# EAGLE board DetBackplane01 (EAGLE 7.7.0)
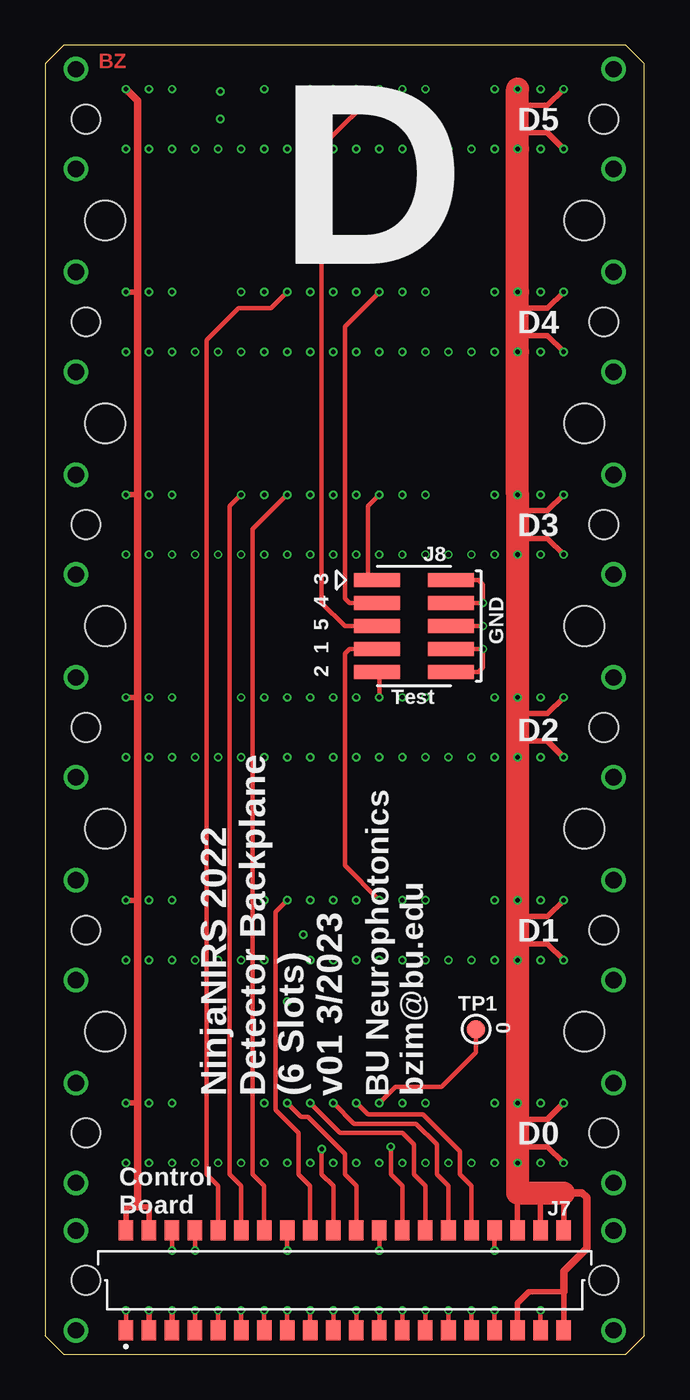
[diagram p0: board, top side]
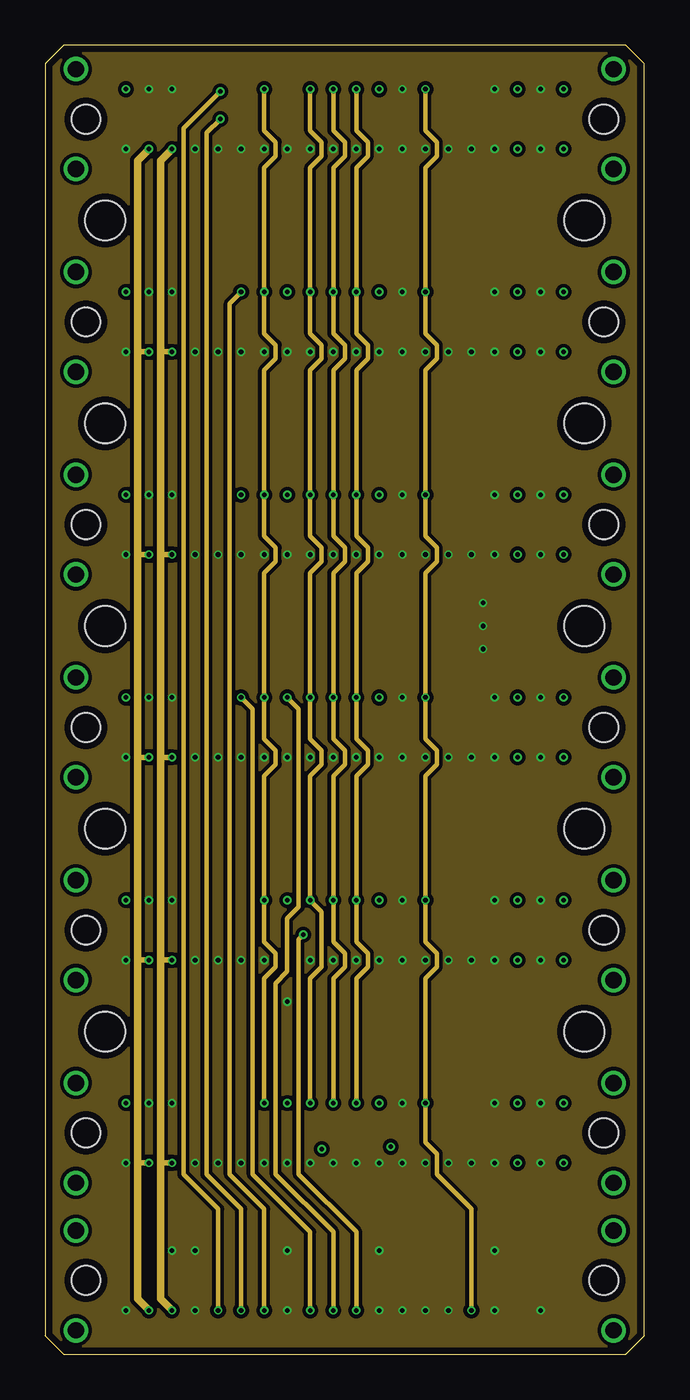
[diagram p1: board, inner layer Route2]
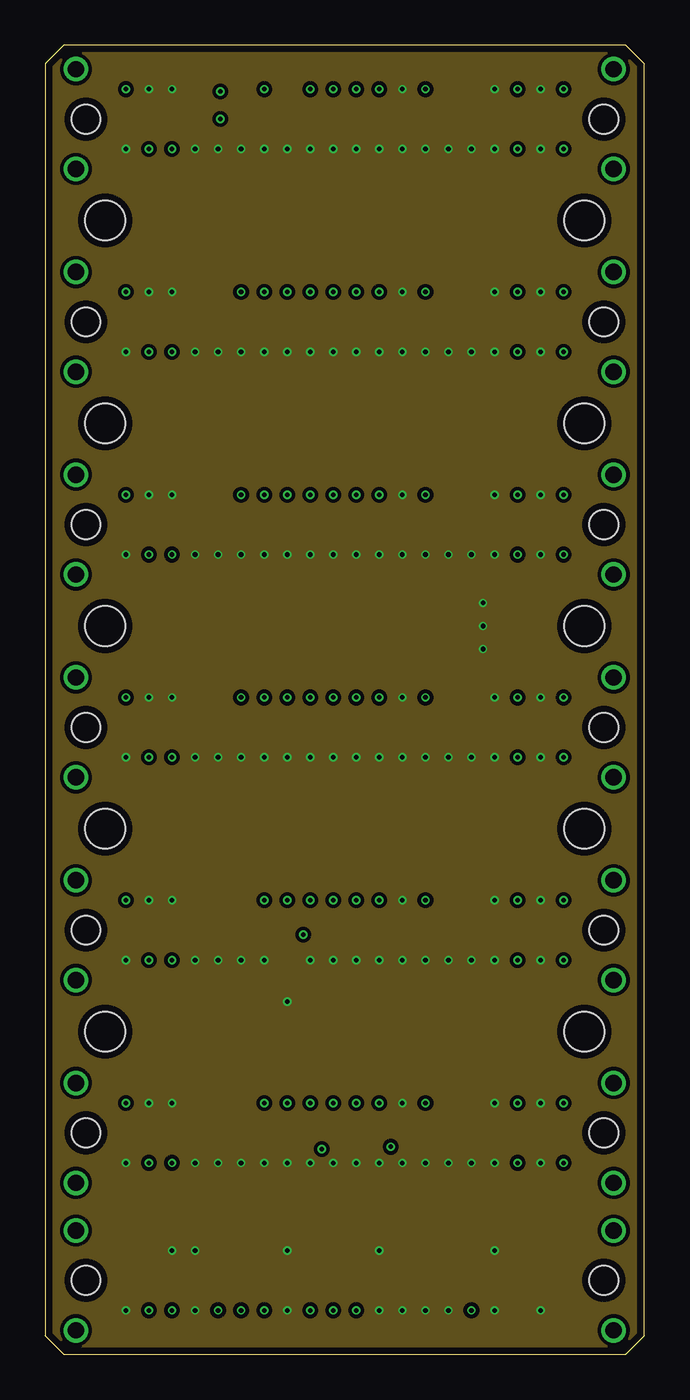
[diagram p2: board, inner layer Route15]
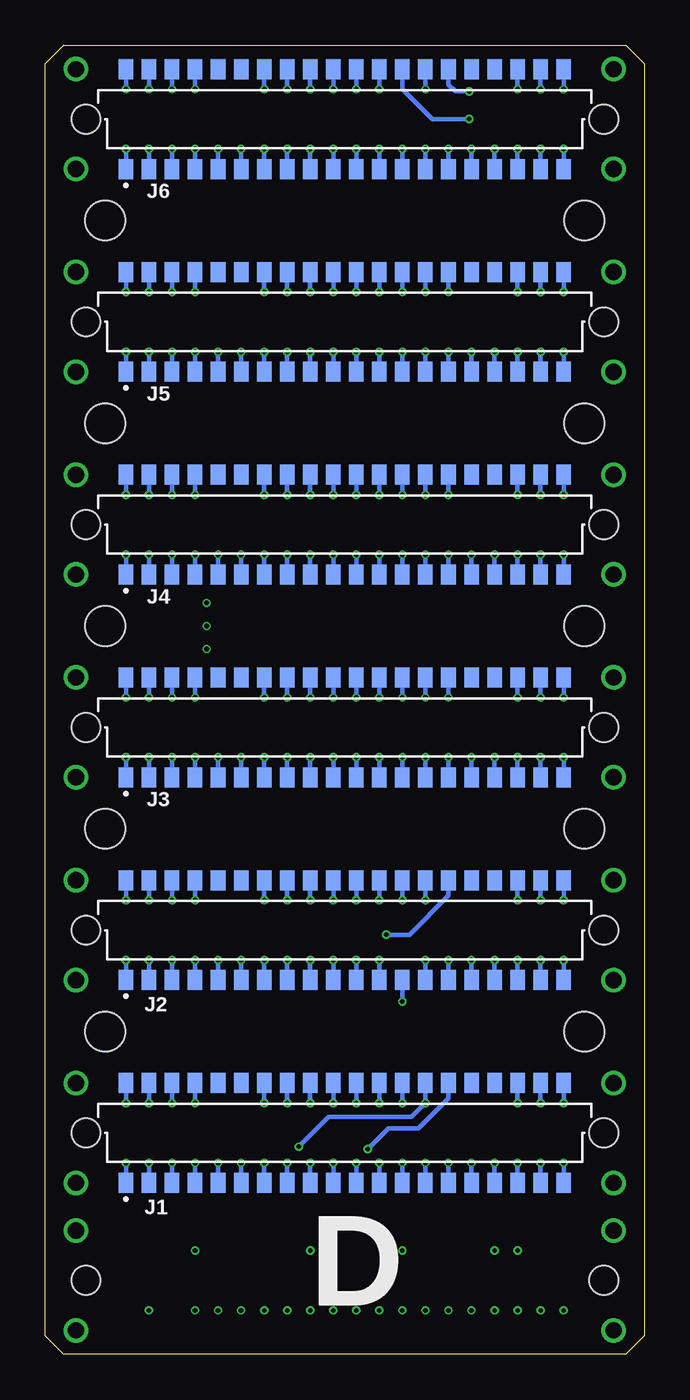
[diagram p3: board, bottom side, seen from below]

Size 33.02 x 72.14 mm. Coordinates in mm from the lower left corner, seen from the top.
Outline: 0,71.12 0,1.02 1.02,0 32,0 33.02,1.02 33.02,71.12 32,72.14 1.02,72.14 0,71.12
Copper layers (1*2*15*16): Top 0.035559375mm / dielectric 0.17018125mm / Route2 0.01778125mm / dielectric 47mil / Route15 0.01778125mm / dielectric 0.17018125mm / Bottom 0.035559375mm
Design rules "OSHPark-4layer *": minimum track width 5mil, minimum drill 10mil, track to track 5mil, track to pad 5mil, pad to pad 5mil, via to via 5mil, smd to smd 5mil, copper to edge 15mil, drill to drill 6mil, minimum pad ring 4mil, minimum via ring 4mil, stop-mask expansion 2.5mil, vias tented up to drill 12mil, thermal gap 10mil
Holes 2.2 mm at 3.3,40.13 3.3,28.96 3.3,17.78 29.72,40.13 29.72,28.96 29.72,17.78 3.3,51.31 3.3,62.48 29.72,51.31 29.72,62.48

## Footprints (pad centres in the part's own frame; a part is rotated, then mirrored left to right if it is on the bottom)
M20X2_HARFLEX_F_STR_MPTH = smd 0.8 x 1.1: A1 12.065,2.75; A2 10.795,2.75; A3 9.525,2.75; A4 8.255,2.75; A5 6.985,2.75; A6 5.715,2.75; A7 4.445,2.75; A8 3.175,2.75; A9 1.905,2.75; A10 0.635,2.75; A11 -0.635,2.75; A12 -1.905,2.75; A13 -3.175,2.75; A14 -4.445,2.75; A15 -5.715,2.75; A16 -6.985,2.75; A17 -8.255,2.75; A18 -9.525,2.75; A19 -10.795,2.75; A20 -12.065,2.75; B1 12.065,-2.75; B2 10.795,-2.75; B3 9.525,-2.75; B4 8.255,-2.75; B5 6.985,-2.75; B6 5.715,-2.75; B7 4.445,-2.75; B8 3.175,-2.75; B9 1.905,-2.75; B10 0.635,-2.75; B11 -0.635,-2.75; B12 -1.905,-2.75; B13 -3.175,-2.75; B14 -4.445,-2.75; B15 -5.715,-2.75; B16 -6.985,-2.75; B17 -8.255,-2.75; B18 -9.525,-2.75; B19 -10.795,-2.75; B20 -12.065,-2.75 | drill 0.9 pad 1.35: M1 -14.825,2.75; M2 14.825,2.75; M3 -14.825,-2.75; M4 14.825,-2.75 | hole 1.6: -14.275,0; 14.275,0
M05X2_0.050_SMD_NO_CREAM = smd 2.54 x 0.762: 1 -2.032,2.54; 2 2.032,2.54; 3 -2.032,1.27; 4 2.032,1.27; 5 -2.032,0; 6 2.032,0; 7 -2.032,-1.27; 8 2.032,-1.27; 9 -2.032,-2.54; 10 2.032,-2.54
TESTPAD_ROUND = smd 1.016 x 1.016: P$1 0,0

## Placement (x,y rotation side)
J1  M20X2_STR_MPTH  [M20X2_HARFLEX_F_STR_MPTH]  16.51,12.19 180 bottom
J2  M20X2_STR_MPTH  [M20X2_HARFLEX_F_STR_MPTH]  16.51,23.37 180 bottom
J3  M20X2_STR_MPTH  [M20X2_HARFLEX_F_STR_MPTH]  16.51,34.54 180 bottom
J4  M20X2_STR_MPTH  [M20X2_HARFLEX_F_STR_MPTH]  16.51,45.72 180 bottom
J5  M20X2_STR_MPTH  [M20X2_HARFLEX_F_STR_MPTH]  16.51,56.9 180 bottom
J6  M20X2_STR_MPTH  [M20X2_HARFLEX_F_STR_MPTH]  16.51,68.07 180 bottom
J7  M20X2_STR_MPTH  [M20X2_HARFLEX_F_STR_MPTH]  16.51,4.06 180 top
J8  M05X2_SMD_0.050_NOCREAM  [M05X2_0.050_SMD_NO_CREAM]  20.32,40.13 0 top
TP1  TESTPOINT_ROUND  [TESTPAD_ROUND]  23.75,17.91 0 top

## Library data of the parts
J1-J8 TP1 = MyLib

## Nets
DET_C0: J1.B10 J2.B10 J3.B10 J4.B10 J5.B10 J6.B10 J7.B16
DET_C1: J1.B11 J2.B11 J3.B11 J4.B11 J5.B11 J6.B11 J7.B15
DET_C2: J1.B12 J2.B12 J3.B12 J4.B12 J5.B12 J6.B12 J7.B14
DET_C3: J1.B14 J2.B14 J3.B14 J4.B14 J5.B14 J6.B14 J7.B13
DET_D0: J1.B13 J7.B11
DET_D1: J1.B15 J7.B10
DET_D2: J2.B13 J7.B9
DET_D3: J2.B15 J7.A11
DET_D4: J3.B13 J7.A10
DET_D5: J3.B15 J7.A9
DET_D6: J4.B13 J7.B7
DET_D7: J4.B15 J7.B6
DET_D8: J5.B13 J7.B5
DET_D9: J5.B15 J7.A7
DET_D10: J6.B13 J7.A6
DET_D11: J6.B15 J7.A5
DETB_RUN: J1.B7 J2.B7 J3.B7 J4.B7 J5.B7 J6.B7 J7.A16
GND: J1.A2 J1.A4 J1.A5 J1.A6 J1.A7 J1.A8 J1.A9 J1.A10 J1.A11 J1.A12 J1.A13 J1.A14 J1.A15 J1.A16 J1.A17 J1.A20 J1.B2 J1.B4 J1.B8 J1.B18 J1.B19 J2.A2 J2.A4 J2.A5 J2.A6 J2.A7 J2.A8 J2.A9 J2.A10 J2.A11 J2.A12 J2.A13 J2.A14 J2.A15 J2.A16 J2.A17 J2.A20 J2.B2 J2.B4 J2.B8 J2.B18 J2.B19 J3.A2 J3.A4 J3.A5 J3.A6 J3.A7 J3.A8 J3.A9 J3.A10 J3.A11 J3.A12 J3.A13 J3.A14 J3.A15 J3.A16 J3.A17 J3.A20 J3.B2 J3.B4 J3.B8 J3.B18 J3.B19 J4.A2 J4.A4 J4.A5 J4.A6 J4.A7 J4.A8 J4.A9 J4.A10 J4.A11 J4.A12 J4.A13 J4.A14 J4.A15 J4.A16 J4.A17 J4.A20 J4.B2 J4.B4 J4.B8 J4.B18 J4.B19 J5.A2 J5.A4 J5.A5 J5.A6 J5.A7 J5.A8 J5.A9 J5.A10 J5.A11 J5.A12 J5.A13 J5.A14 J5.A15 J5.A16 J5.A17 J5.A20 J5.B2 J5.B4 J5.B8 J5.B18 J5.B19 J6.A2 J6.A4 J6.A5 J6.A6 J6.A7 J6.A8 J6.A9 J6.A10 J6.A11 J6.A12 J6.A13 J6.A14 J6.A15 J6.A16 J6.A17 J6.A20 J6.B2 J6.B4 J6.B8 J6.B18 J6.B19 J7.A1 J7.A4 J7.A8 J7.A12 J7.A13 J7.A14 J7.A15 J7.A17 J7.A19 J7.B3 J7.B4 J7.B8 J7.B12 J7.B17 J8.2 J8.4 J8.6 J8.8 J8.10
N$1: J1.B9 TP1.P$1
RES1: J2.B9 J8.7
RES2: J3.B9 J8.9
RES3: J4.B9 J8.1
RES4: J5.B9 J8.3
RES5: J6.B9 J8.5
V5P1: J1.A1 J1.A3 J1.B1 J1.B3 J2.A1 J2.A3 J2.B1 J2.B3 J3.A1 J3.A3 J3.B1 J3.B3 J4.A1 J4.A3 J4.B1 J4.B3 J5.A1 J5.A3 J5.B1 J5.B3 J6.A1 J6.A3 J6.B1 J6.B3 J7.A18 J7.A20 J7.B18 J7.B19 J7.B20
V9P0: J1.A18 J2.A18 J3.A18 J4.A18 J5.A18 J6.A18 J7.A3
VN3P4: J1.A19 J2.A19 J3.A19 J4.A19 J5.A19 J6.A19 J7.A2
VN22: J1.B20 J2.B20 J3.B20 J4.B20 J5.B20 J6.B20 J7.B1 J7.B2

## Tracks (layer width: path | path; a pad name or v marks a point on that pad's centre or on a via)
DET_C0  (via drill 0.25)
  Top 0.254: J7.B16 23.5,9.27 22.86,9.91 22.86,11.18 20.83,13.21 17.78,13.21 v17.14,13.84
  Route2 0.254: v17.14,13.84 17.14,20.7 17.78,21.34 17.78,22.1 17.14,22.73 v17.14,25.02 17.14,31.88 17.78,32.51 17.78,33.27 17.14,33.91 v17.14,36.2 17.14,43.05 17.78,43.69 17.78,44.45 17.14,45.09 v17.14,47.37 17.14,54.23 17.78,54.86 17.78,55.63 17.14,56.26 v17.14,58.55 17.14,65.41 17.78,66.04 17.78,66.8 17.14,67.44 v17.14,69.72
  Bottom 0.254: v17.14,69.72 J6.B10 | J5.B10 v17.14,58.55 | J1.B10 v17.14,13.84 | J3.B10 v17.14,36.2 | J4.B10 v17.14,47.37 | J2.B10 v17.14,25.02
DET_C1  (via drill 0.25)
  Top 0.254: J7.B15 22.23,9.27 21.59,9.91 21.59,11.56 20.45,12.7 17.02,12.7 v15.88,13.84
  Route2 0.254: v15.88,13.84 15.88,20.7 16.51,21.34 16.51,22.1 15.88,22.73 v15.88,25.02 15.88,31.88 16.51,32.51 16.51,33.27 15.88,33.91 v15.88,36.2 15.88,43.05 16.51,43.69 16.51,44.45 15.88,45.09 v15.88,47.37 15.88,54.23 16.51,54.86 16.51,55.63 15.88,56.26 v15.88,58.55 15.88,65.41 16.51,66.04 16.51,66.8 15.88,67.44 v15.88,69.72
  Bottom 0.254: v15.88,69.72 J6.B11 | J5.B11 v15.88,58.55 | J1.B11 v15.88,13.84 | J3.B11 v15.88,36.2 | J4.B11 v15.88,47.37 | J2.B11 v15.88,25.02
DET_C2  (via drill 0.25)
  Top 0.254: J7.B14 20.95,9.27 20.32,9.91 20.32,11.56 19.68,12.19 16.26,12.19 v14.61,13.84
  Route2 0.254: v14.61,13.84 14.61,20.7 15.24,21.34 15.24,24.38 v14.61,25.02 14.61,31.88 15.24,32.51 15.24,33.27 14.61,33.91 v14.61,36.2 14.61,43.05 15.24,43.69 15.24,44.45 14.61,45.09 v14.61,47.37 14.61,54.23 15.24,54.86 15.24,55.63 14.61,56.26 v14.61,58.55 14.61,65.41 15.24,66.04 15.24,66.8 14.61,67.44 v14.61,69.72
  Bottom 0.254: v14.61,69.72 J6.B12 | J5.B12 v14.61,58.55 | J2.B12 v14.61,25.02 | J1.B12 v14.61,13.84 | J3.B12 v14.61,36.2 | J4.B12 v14.61,47.37
DET_C3  (via drill 0.25)
  Top 0.254: J7.B13 19.68,9.27 19.05,9.91 v19.05,11.43
  Route2 0.254: v12.06,13.84 12.06,20.7 12.7,21.34 12.7,22.1 12.06,22.73 v12.06,25.02 12.06,31.88 12.7,32.51 12.7,33.27 12.06,33.91 v12.06,36.2 12.06,43.05 12.7,43.69 12.7,44.45 12.06,45.09 v12.06,47.37 12.06,54.23 12.7,54.86 12.7,55.63 12.06,56.26 v12.06,58.55 12.06,65.41 12.7,66.04 12.7,66.8 12.06,67.44 v12.06,69.72
  Bottom 0.254: v19.05,11.43 17.4,13.08 12.83,13.08 v12.06,13.84 J1.B14 | v12.06,69.72 J6.B14 | J2.B14 v12.06,25.02 | J3.B14 v12.06,36.2 | J4.B14 v12.06,47.37 | J5.B14 v12.06,58.55
DET_D0  (via drill 0.25)
  Top 0.254: J7.B11 17.14,9.27 16.51,9.91 16.51,11.05 14.48,13.08 14.1,13.08 v13.34,13.84
  Bottom 0.254: J1.B13 v13.34,13.84
DET_D1  (via drill 0.25)
  Top 0.254: J7.B10 15.88,9.27 15.24,9.91 v15.24,11.3
  Bottom 0.254: v15.24,11.3 14.1,12.45 12.45,12.45 10.79,14.1 J1.B15
DET_D2  (via drill 0.25)
  Top 0.254: J7.B9 14.61,9.27 13.97,9.91 13.97,12.19 12.7,13.46 12.7,24.38 v13.34,25.02
  Bottom 0.254: v13.34,25.02 J2.B13
DET_D3  (via drill 0.25)
  Top 0.254: J7.A11 v17.14,2.41
  Route2 0.254: v17.14,2.41 17.14,6.73 13.97,9.91 13.97,22.86 v14.22,23.11
  Bottom 0.254: v14.22,23.11 12.95,23.11 10.79,25.27 J2.B15
DET_D4  (via drill 0.25)
  Top 0.254: J7.A10 v15.88,2.41
  Route2 0.254: v15.88,2.41 15.88,6.73 12.7,9.91 12.7,20.45 13.34,21.08 13.34,24 13.97,24.64 13.97,35.56 v13.34,36.2
  Bottom 0.254: v13.34,36.2 J3.B13
DET_D5  (via drill 0.25)
  Top 0.254: J7.A9 v14.61,2.41
  Route2 0.254: v14.61,2.41 14.61,6.73 11.43,9.91 11.43,35.56 v10.79,36.2
  Bottom 0.254: v10.79,36.2 J3.B15
DET_D6  (via drill 0.25)
  Top 0.254: J7.B7 12.06,9.27 11.43,9.91 11.43,45.47 v13.34,47.37
  Bottom 0.254: v13.34,47.37 J4.B13
DET_D7  (via drill 0.25)
  Top 0.254: J7.B6 10.79,9.27 10.16,9.91 10.16,46.74 v10.79,47.37
  Bottom 0.254: v10.79,47.37 J4.B15
DET_D8  (via drill 0.25)
  Top 0.254: J7.B5 9.53,9.27 8.89,9.91 8.89,55.88 10.67,57.66 12.45,57.66 v13.34,58.55
  Bottom 0.254: v13.34,58.55 J5.B13
DET_D9  (via drill 0.25)
  Top 0.254: J7.A7 v12.06,2.41
  Route2 0.254: v12.06,2.41 12.06,8 10.16,9.91 10.16,57.91 v10.79,58.55
  Bottom 0.254: v10.79,58.55 J5.B15
DET_D10  (via drill 0.25)
  Top 0.254: J7.A6 v10.79,2.41
  Route2 0.254: v10.79,2.41 10.79,8 8.89,9.91 8.89,67.31 v9.65,68.07
  Bottom 0.254: v9.65,68.07 11.68,68.07 13.34,69.72 J6.B13
DET_D11  (via drill 0.25)
  Top 0.254: J7.A5 v9.53,2.41
  Route2 0.254: v9.53,2.41 9.53,8 7.62,9.91 7.62,67.56 v9.65,69.6
  Bottom 0.254: v9.65,69.6 10.41,69.6 10.79,69.98 J6.B15
DETB_RUN  (via drill 0.25)
  Top 0.254: J7.A16 v23.5,2.41
  Route2 0.254: v23.5,2.41 23.5,8 21.59,9.91 21.59,11.05 20.95,11.68 v20.95,13.84 20.95,20.7 21.59,21.34 21.59,22.1 20.95,22.73 v20.95,25.02 20.95,31.88 21.59,32.51 21.59,33.27 20.95,33.91 v20.95,36.2 20.95,43.05 21.59,43.69 21.59,44.45 20.95,45.09 v20.95,47.37 20.95,54.23 21.59,54.86 21.59,55.63 20.95,56.26 v20.95,58.55 20.95,65.41 21.59,66.04 21.59,66.8 20.95,67.44 v20.95,69.72
  Bottom 0.254: J4.B7 v20.95,47.37 | J3.B7 v20.95,36.2 | J2.B7 v20.95,25.02 | v20.95,13.84 J1.B7 | v20.95,69.72 J6.B7 | J5.B7 v20.95,58.55
GND  (via drill 0.25)
  Top 0.254: J7.B17 v24.77,5.71 | J7.B12 v18.41,5.71 | J7.A17 v24.77,2.41 | J7.A19 v27.3,2.41 | J7.A15 v22.23,2.41 | J7.A14 v20.95,2.41 | J7.A13 v19.68,2.41 | J7.A12 v18.41,2.41 | J7.B8 v13.34,5.71 | J7.B4 v8.26,5.71 | J7.B3 v6.99,5.71 | J7.A1 v4.45,2.41 | J7.A4 v8.26,2.41 | J7.A8 v13.34,2.41 | J8.2 23.88,42.67 24.13,42.42 v24.13,41.4 J8.4 | J8.10 23.88,37.59 24.13,37.85 v24.13,38.86 J8.8 | J8.6 v24.13,40.13
  Bottom 0.254: J4.B19 v5.71,47.37 | J4.B18 v6.99,47.37 | J4.A20 v4.45,44.07 | J4.A16 v9.53,44.07 | J4.A17 v8.26,44.07 | J4.A15 v10.79,44.07 | J4.A14 v12.06,44.07 | J4.A13 v13.34,44.07 | J4.A12 v14.61,44.07 | J4.A11 v15.88,44.07 | J4.A10 v17.14,44.07 | J4.A9 v18.41,44.07 | J4.A8 v19.68,44.07 | J4.A6 v22.23,44.07 | J4.A5 v23.5,44.07 | J4.A4 v24.77,44.07 | J4.A7 v20.95,44.07 | J4.A2 v27.3,44.07 | J4.B4 v24.77,47.37 | J4.B2 v27.3,47.37 | J4.B8 v19.68,47.37 | J3.B4 v24.77,36.2 | J3.B2 v27.3,36.2 | J3.A2 v27.3,32.89 | J3.A5 v23.5,32.89 | J3.A4 v24.77,32.89 | J3.A7 v20.95,32.89 | J3.A8 v19.68,32.89 | J3.B8 v19.68,36.2 | J3.A9 v18.41,32.89 | J3.A10 v17.14,32.89 | J3.A11 v15.88,32.89 | J3.A12 v14.61,32.89 | J3.A13 v13.34,32.89 | J3.A14 v12.06,32.89 | J3.A15 v10.79,32.89 | J3.A16 v9.53,32.89 | J3.A17 v8.26,32.89 | J3.A20 v4.45,32.89 | v5.71,36.2 J3.B19 | v6.99,36.2 J3.B18 | J3.A6 v22.23,32.89 | v6.99,25.02 J2.B18 | v5.71,25.02 J2.B19 | J2.A20 v4.45,21.72 | J2.A17 v8.26,21.72 | J2.A16 v9.53,21.72 | J2.A15 v10.79,21.72 | J2.A14 v12.06,21.72 | J2.A12 v14.61,21.72 | J2.A10 v17.14,21.72 | J2.A9 v18.41,21.72 | J2.A8 v19.68,21.72 | J2.A7 v20.95,21.72 | J2.A6 v22.23,21.72 | J2.A5 v23.5,21.72 | J2.A4 v24.77,21.72 | v27.3,25.02 J2.B2 | J2.B4 v24.77,25.02 | J2.A2 v27.3,21.72 | J2.B8 v19.68,25.02 | v19.68,13.84 J1.B8 | v24.77,13.84 J1.B4 | v27.3,13.84 J1.B2 | v27.3,10.54 J1.A2 | v24.77,10.54 J1.A4 | v23.5,10.54 J1.A5 | v22.23,10.54 J1.A6 | v20.95,10.54 J1.A7 | v19.68,10.54 J1.A8 | v17.14,10.54 J1.A10 | v15.88,10.54 J1.A11 | v14.61,10.54 J1.A12 | J1.A14 v12.06,10.54 | J1.A15 v10.79,10.54 | J1.A16 v9.53,10.54 | J1.A17 v8.26,10.54 | J1.A20 v4.45,10.54 | v5.71,13.84 J1.B19 | v6.99,13.84 J1.B18 | J1.A13 v13.34,10.54 | J1.A9 v18.41,10.54 | J2.A11 v15.88,21.72 | v27.3,69.72 J6.B2
  Bottom 0.254: v24.77,69.72 J6.B4 | v24.77,66.42 J6.A4 | v27.3,66.42 J6.A2 | v23.5,66.42 J6.A5 | v22.23,66.42 J6.A6 | v20.95,66.42 J6.A7 | v19.68,69.72 J6.B8 | v19.68,66.42 J6.A8 | v18.41,66.42 J6.A9 | v17.14,66.42 J6.A10 | v15.88,66.42 J6.A11 | v14.61,66.42 J6.A12 | v13.34,66.42 J6.A13 | v12.06,66.42 J6.A14 | v10.79,66.42 J6.A15 | v9.53,66.42 J6.A16 | v8.26,66.42 J6.A17 | v4.45,66.42 J6.A20 | v5.71,69.72 J6.B19 | v6.99,69.72 J6.B18 | v27.3,58.55 J5.B2 | v24.77,58.55 J5.B4 | v19.68,58.55 J5.B8 | J5.A2 v27.3,55.24 | J5.A4 v24.77,55.24 | J5.A5 v23.5,55.24 | J5.A6 v22.23,55.24 | J5.A7 v20.95,55.24 | J5.A8 v19.68,55.24 | J5.A9 v18.41,55.24 | J5.A10 v17.14,55.24 | J5.A12 v14.61,55.24 | J5.A13 v13.34,55.24 | J5.A14 v12.06,55.24 | J5.A15 v10.79,55.24 | J5.A16 v9.53,55.24 | J5.A17 v8.26,55.24 | J5.A20 v4.45,55.24 | J5.B18 v6.99,58.55 | J5.B19 v5.71,58.55 | J2.A13 v13.34,19.43 | J5.A11 v15.88,55.24
  pour Route15 (isolate 0.203, rank 2): 0,72.14 33.02,72.14 33.02,0 0,0
  pour Route2 (isolate 0.203, rank 2): 0,72.14 33.02,72.14 33.02,0 0,0
N$1  (via drill 0.25)
  Top 0.254: v18.41,13.84 19.3,14.73 21.84,14.73 23.75,16.64 TP1.P$1
  Bottom 0.254: J1.B9 v18.41,13.84
RES1  (via drill 0.25)
  Top 0.254: J8.7 16.76,38.86 16.51,38.61 16.51,26.92 v18.41,25.02
  Bottom 0.254: v18.41,25.02 J2.B9
RES2  (via drill 0.25)
  Top 0.254: J8.9 18.41,37.59 v18.41,36.2
  Bottom 0.254: v18.41,36.2 J3.B9
RES3  (via drill 0.25)
  Top 0.254: J8.1 17.78,42.67 17.78,46.74 v18.41,47.37
  Bottom 0.254: v18.41,47.37 J4.B9
RES4  (via drill 0.25)
  Top 0.254: J8.3 16.76,41.4 16.51,41.66 16.51,56.64 v18.41,58.55
  Bottom 0.254: v18.41,58.55 J5.B9
RES5  (via drill 0.25)
  Top 0.254: J8.5 16.51,40.13 15.24,41.4 15.24,66.55 v18.41,69.72
  Bottom 0.254: v18.41,69.72 J6.B9
V5P1  (via drill 0.25)
  Top 0.305: J7.A18 26.04,2.79 26.67,3.43 28.57,3.43 J7.A20 | v28.57,47.37 27.69,46.48 26.04,46.48 | v28.57,44.07 27.69,44.96 26.04,44.96 | v28.57,36.2 27.69,35.31 26.04,35.31 | v28.57,32.89 27.69,33.78 26.04,33.78 | v28.57,25.02 27.69,24.13 26.04,24.13 | v28.57,21.72 27.69,22.61 26.04,22.61 | v28.57,13.84 27.69,12.95 26.04,12.95 | v28.57,10.54 27.69,11.43 26.04,11.43 | J7.B18 26.04,8.89 | J7.B19 27.3,8.89 | J7.B20 28.57,8.89 | v28.57,69.72 27.69,68.83 26.04,68.83 | v28.57,66.42 27.69,67.31 26.04,67.31 | v28.57,58.55 27.69,57.66 26.04,57.66 | v28.57,55.24 27.69,56.13 26.04,56.13
  Top 0.406: 28.57,3.43 28.57,4.57 29.84,5.84 29.84,8.64 29.59,8.89 28.57,8.89
  Top 1.27: 28.57,8.89 27.3,8.89 26.04,8.89 v26.04,10.54 26.04,11.43 26.04,12.95 v26.04,13.84 v26.04,21.72 26.04,22.61 26.04,24.13 v26.04,25.02 v26.04,32.89 26.04,33.78 26.04,35.31 v26.04,36.2 v26.04,44.07 26.04,44.96 26.04,46.48 v26.04,47.37 v26.04,55.24 26.04,56.13 26.04,57.66 v26.04,58.55 v26.04,66.42 26.04,67.31 26.04,68.83 v26.04,69.72
  Bottom 0.254: J4.A3 v26.04,44.07 | J4.A1 v28.57,44.07 | J4.B3 v26.04,47.37 | J4.B1 v28.57,47.37 | J3.B3 v26.04,36.2 | J3.B1 v28.57,36.2 | J3.A3 v26.04,32.89 | J3.A1 v28.57,32.89 | J2.A3 v26.04,21.72 | J2.B3 v26.04,25.02 | J2.B1 v28.57,25.02 | J2.A1 v28.57,21.72 | v26.04,13.84 J1.B3 | v28.57,13.84 J1.B1 | v28.57,10.54 J1.A1 | v26.04,10.54 J1.A3 | v28.57,69.72 J6.B1 | v26.04,69.72 J6.B3 | v26.04,66.42 J6.A3 | v28.57,66.42 J6.A1 | v28.57,58.55 J5.B1 | v26.04,58.55 J5.B3 | J5.A1 v28.57,55.24 | J5.A3 v26.04,55.24
V9P0  (via drill 0.25)
  Top 0.305: J7.A3 v6.99,2.41
  Route2 0.305: v6.99,32.89 6.35,32.89 | v6.99,21.72 6.35,21.72 | v6.99,10.54 6.35,10.54 | v6.99,44.07 6.35,44.07 | v6.99,55.24 6.35,55.24
  Route2 0.406: v6.99,2.41 6.35,3.05 6.35,10.54 6.35,21.72 6.35,32.89 6.35,44.07 6.35,55.24 6.35,65.79 v6.99,66.42
  Bottom 0.254: J3.A18 v6.99,32.89 | J2.A18 v6.99,21.72 | J1.A18 v6.99,10.54 | J4.A18 v6.99,44.07 | v6.99,66.42 J6.A18 | J5.A18 v6.99,55.24
VN3P4  (via drill 0.25)
  Top 0.305: J7.A2 v5.71,2.41
  Route2 0.305: v5.71,32.89 5.08,32.89 | v5.71,21.72 5.08,21.72 | v5.71,10.54 5.08,10.54 | v5.71,44.07 5.08,44.07 | v5.71,55.24 5.08,55.24
  Route2 0.406: v5.71,2.41 5.08,3.05 5.08,10.54 5.08,21.72 5.08,32.89 5.08,44.07 5.08,55.24 5.08,65.79 v5.71,66.42
  Bottom 0.254: J4.A19 v5.71,44.07 | J3.A19 v5.71,32.89 | J2.A19 v5.71,21.72 | J1.A19 v5.71,10.54 | v5.71,66.42 J6.A19 | J5.A19 v5.71,55.24
VN22  (via drill 0.25)
  Top 0.305: J7.B1 4.45,8 4.57,8.13 5.08,8.13 5.59,8.13 5.71,8 J7.B2 | v4.45,13.84 4.95,13.84 5.08,13.72 | v4.45,25.02 5.08,25.02 | v4.45,36.2 5.08,36.2 | v4.45,47.37 5.08,47.37 | v4.45,58.55 5.08,58.55
  Top 0.406: 5.08,8.13 5.08,13.72 5.08,25.02 5.08,36.2 5.08,47.37 5.08,58.55 5.08,69.09 v4.45,69.72
  Bottom 0.254: J4.B20 v4.45,47.37 | J3.B20 v4.45,36.2 | v4.45,25.02 J2.B20 | v4.45,13.84 J1.B20 | v4.45,69.72 J6.B20 | J5.B20 v4.45,58.55

## Text on the board
Top: BZ
tPlace: D5 | D | D4 | D3 | 3 | 4 | 5 | 1 | GND | 2 | Test | D2 | D1 | 0 | NinjaNIRS 2022 / Detector Backplane / (6 Slots) / v01 3/2023 | BU Neurophotonics / bzim@bu.edu | D0 | Control / Board
bPlace: D